# Altium PCB pci_104.PcbDoc (part 4 of 4)
Units mil, origin at the board's own origin, x right, y up, seen from the top; angles counter-clockwise.
Board outline 3775.2 x 3550 mil, 4 copper layers (Top Layer - RF, MidLayer2 - GND, MidLayer3 - POWER, Bottom Layer - Digital), stack 61.756 mil thick; 251 components, 242 nets, 872 pads, 382 vias.
Unrouted connection lines stored in the file: 291.
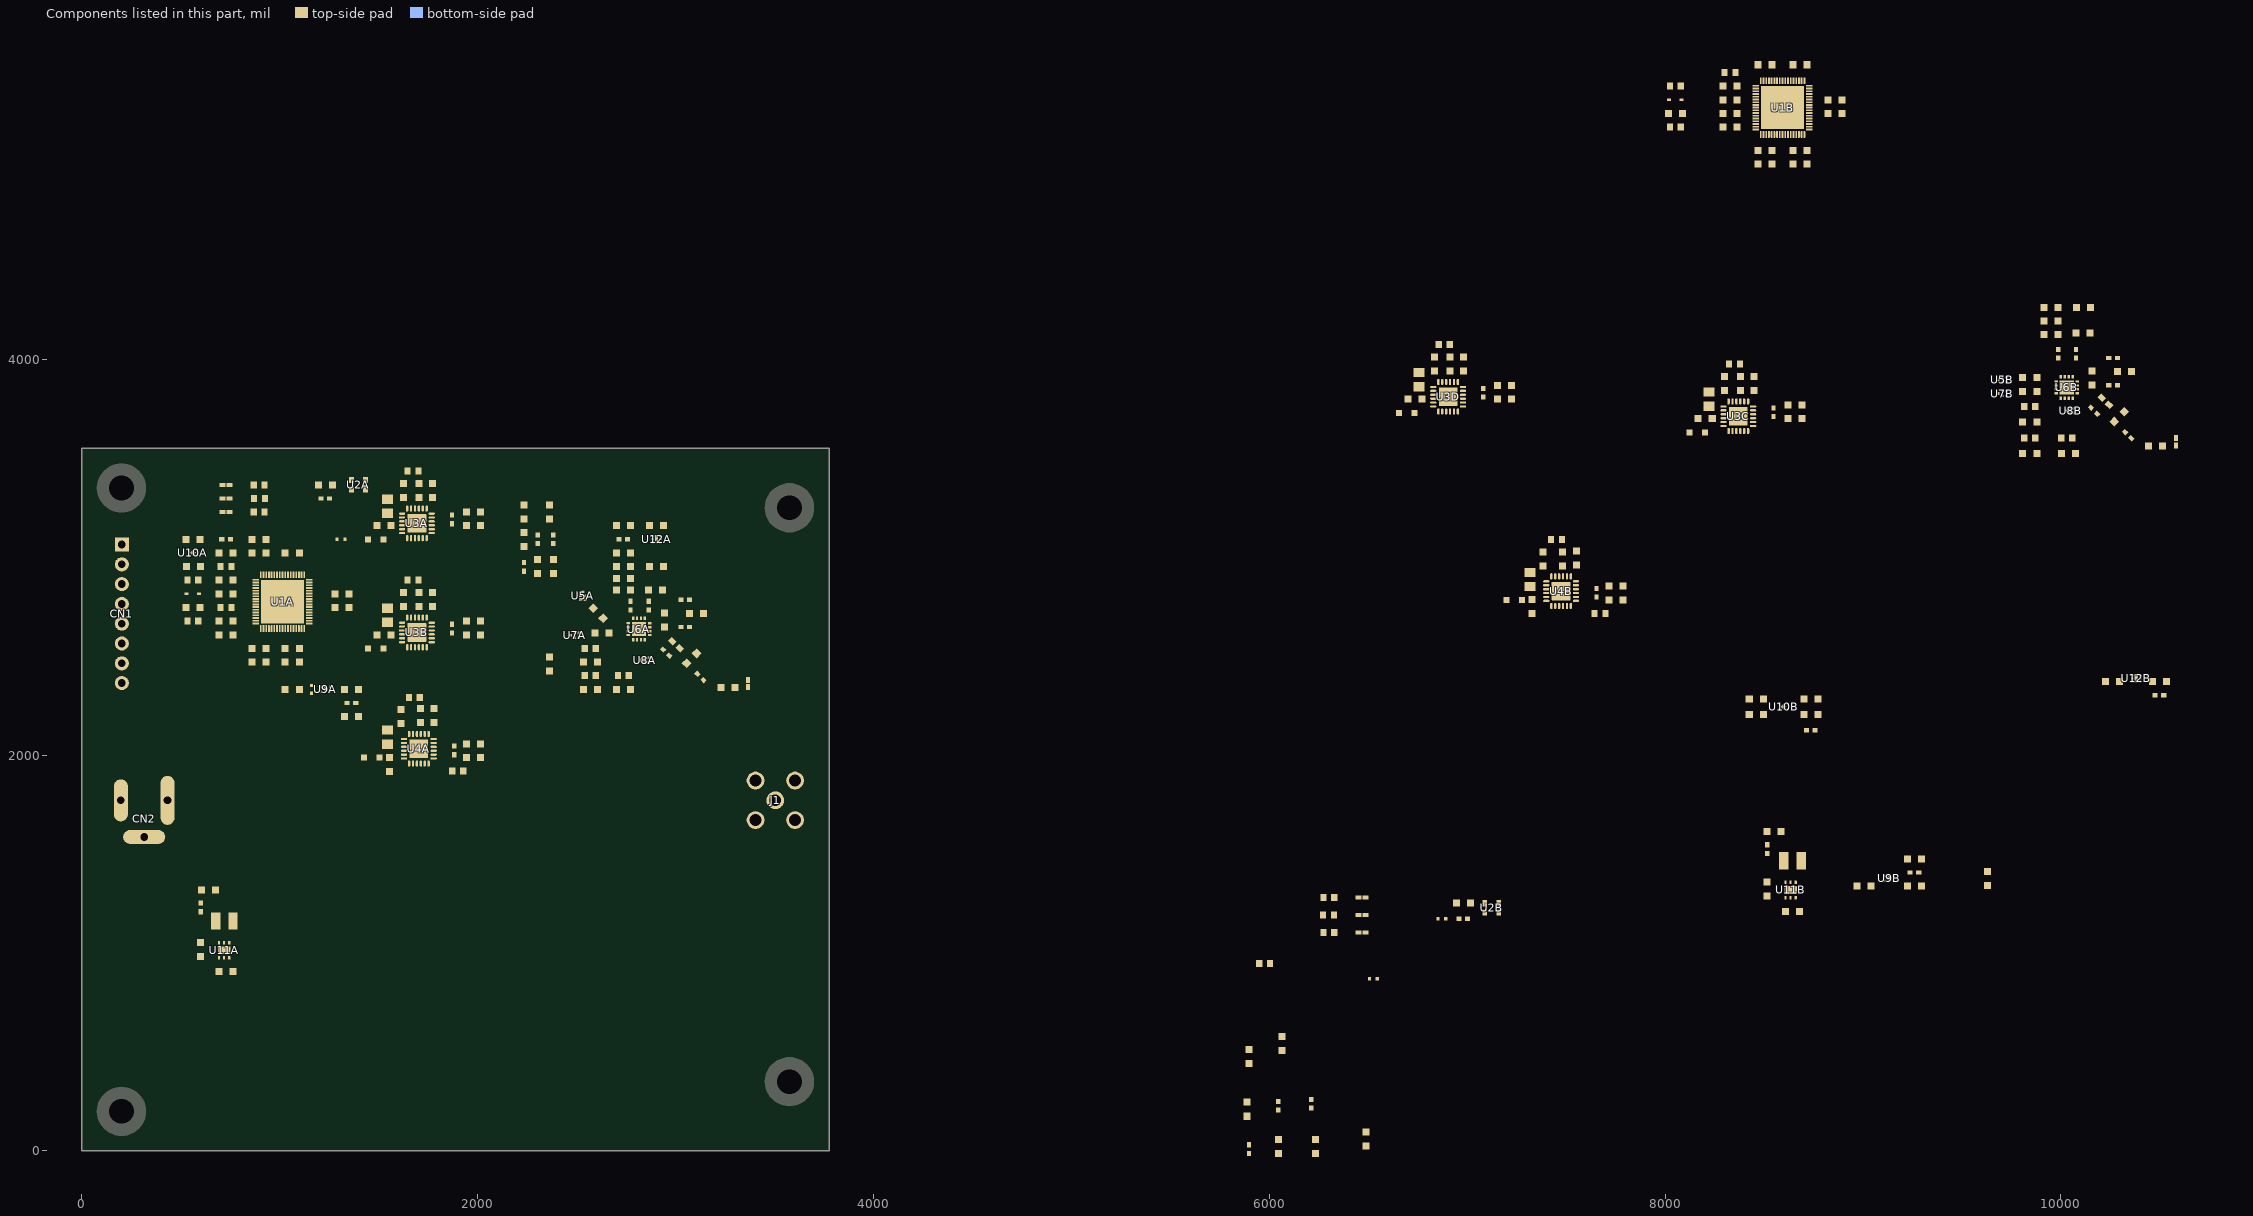
[diagram p5: the components of this part, seen from the top]

## Silkscreen, mask and mechanical layers (free items; w line width, h text height) (continued)
Dimensions:
  drawing of 295 lines, arcs and shapes, not listed
  text "4 mils para la separacion en el SX1302" at -974.25,5785.31 h200
  text "Layer" at -459.31,5378.21 h58.74
  text "Name" at -57.6,5378.21 h58.74
  text "Material" at 1283.64,5378.21 h58.74
  text "Thickness" at 2125.75,5378.21 h58.74
  text "Constant" at 2762.35,5378.21 h58.74
  text "Board Layer Stack" at 3320.65,5378.21 h58.74
  text "Top Overlay" at -57.6,5260.73 h58.74
  text "Top Solder" at -57.6,5143.26 h58.74
  text "Solder Resist" at 1283.64,5143.26 h58.74
  text "0,010mm" at 2125.75,5143.26 h58.74
  text "3.5" at 2762.35,5143.26 h58.74
  text "1" at -459.31,5025.78 h58.74
  text "Top Layer - RF" at -57.6,5025.78 h58.74
  text "0,035mm" at 2125.75,5025.78 h58.74
  text "Dielectric 1" at -57.6,4908.3 h58.74
  text "Core-012" at 1283.64,4908.3 h58.74
  text "0,114mm" at 2125.75,4908.3 h58.74
  text "4.29" at 2762.35,4908.3 h58.74
  text "2" at -459.31,4790.82 h58.74
  text "MidLayer2 - GND" at -57.6,4790.82 h58.74
  text "0,035mm" at 2125.75,4790.82 h58.74
  text "Center Dielectric" at -57.6,4673.34 h58.74
  text "FR-4" at 1283.64,4673.34 h58.74
  text "1,200mm" at 2125.75,4673.34 h58.74
  text "4.3" at 2762.35,4673.34 h58.74
  text "3" at -459.31,4555.87 h58.74
  text "MidLayer3 - POWER" at -57.6,4555.87 h58.74
  text "0,035mm" at 2125.75,4555.87 h58.74
  text "Dielectric 4" at -57.6,4438.39 h58.74
  text "Core-012" at 1283.64,4438.39 h58.74
  text "0,114mm" at 2125.75,4438.39 h58.74
  text "4.29" at 2762.35,4438.39 h58.74
  text "4" at -459.31,4320.91 h58.74
  text "Bottom Layer - Digital" at -57.6,4320.91 h58.74
  text "0,035mm" at 2125.75,4320.91 h58.74
  text "Bottom Solder" at -57.6,4203.43 h58.74
  text "Solder Resist" at 1283.64,4203.43 h58.74
  text "0,010mm" at 2125.75,4203.43 h58.74
  text "3.5" at 2762.35,4203.43 h58.74
  text "Bottom Overlay" at -57.6,4085.96 h58.74

## Dimensions
3575.2,3250 to 3775.2,0 on Dimensions
0,0 to 3575.2,350 on Dimensions
3575.2,3250 to 0,0 on Dimensions
3775.2,0 to 3575.2,350 on Dimensions
0,0 to 200,3350 on Dimensions
200,200 to 0,0 on Dimensions
3503.94,1771.65 to 3775.2,0 on Dimensions
0,0 to 196.85,1771.65 on Dimensions
0,0 to 0,3550 on Dimensions
0,0 to 3775.2,0 on Dimensions

## Text inside footprints (layer, text, board x,y; h text height)
D1A: Mechanical 13 "*" at 589.02,2839.96 h50 r180
D1B: Mechanical 13 "*" at 8080.06,5336.33 h50 r180
U2B: Top Overlay "1" at 7061.02,1192.91 h23.62
U3B: Top Overlay "1" at 1732.28,2757.87 h23.62 r270
U3C: Top Overlay "1" at 8409.45,3850.39 h23.62 r270
U3D: Top Overlay "1" at 6942.91,3948.82 h23.62 r270
U4B: Top Overlay "1" at 7513.78,2966.54 h23.62 r270
U5A: Top Overlay "1" at 2511.89,2826.77 h7.87 r270
U5B: Top Overlay "1" at 9683.07,3876.48 h7.87
U6A: Mechanical 2 "1" at 2736.22,2681.89 h19.68
U6B: Mechanical 2 "1" at 9950.79,3903.54 h19.68
U7A: Top Overlay "1" at 2468.5,2585.92 h7.87
U7B: Top Overlay "1" at 9683.07,3807.58 h7.87
U8A: Top Overlay "1" at 2822.83,2460.63 h7.87
U8B: Top Overlay "1" at 10027.56,3720.47 h7.87
U9A: Top Overlay "1" at 1255.91,2299.21 h15.75 r90
U9B: Top Overlay "1" at 9157.48,1344.49 h15.75 r90
U10A: Top Overlay "1" at 586.61,2988.19 h15.75 r90
U10B: Top Overlay "1" at 8624.02,2210.63 h15.75 r90
U12A: Top Overlay "1" at 2861.22,3100.39 h15.75
U12B: Top Overlay "1" at 10422.83,2377.95 h15.75 r180